# Altium PCB PCB_vpl1.PcbDoc
Units mm, origin at the board's own origin, x right, y up, seen from the top; angles counter-clockwise.
Board outline 50 x 60 mm, 2 copper layers (Top Layer, Bottom Layer); 6 components, 4 nets, 62 pads, 0 vias.
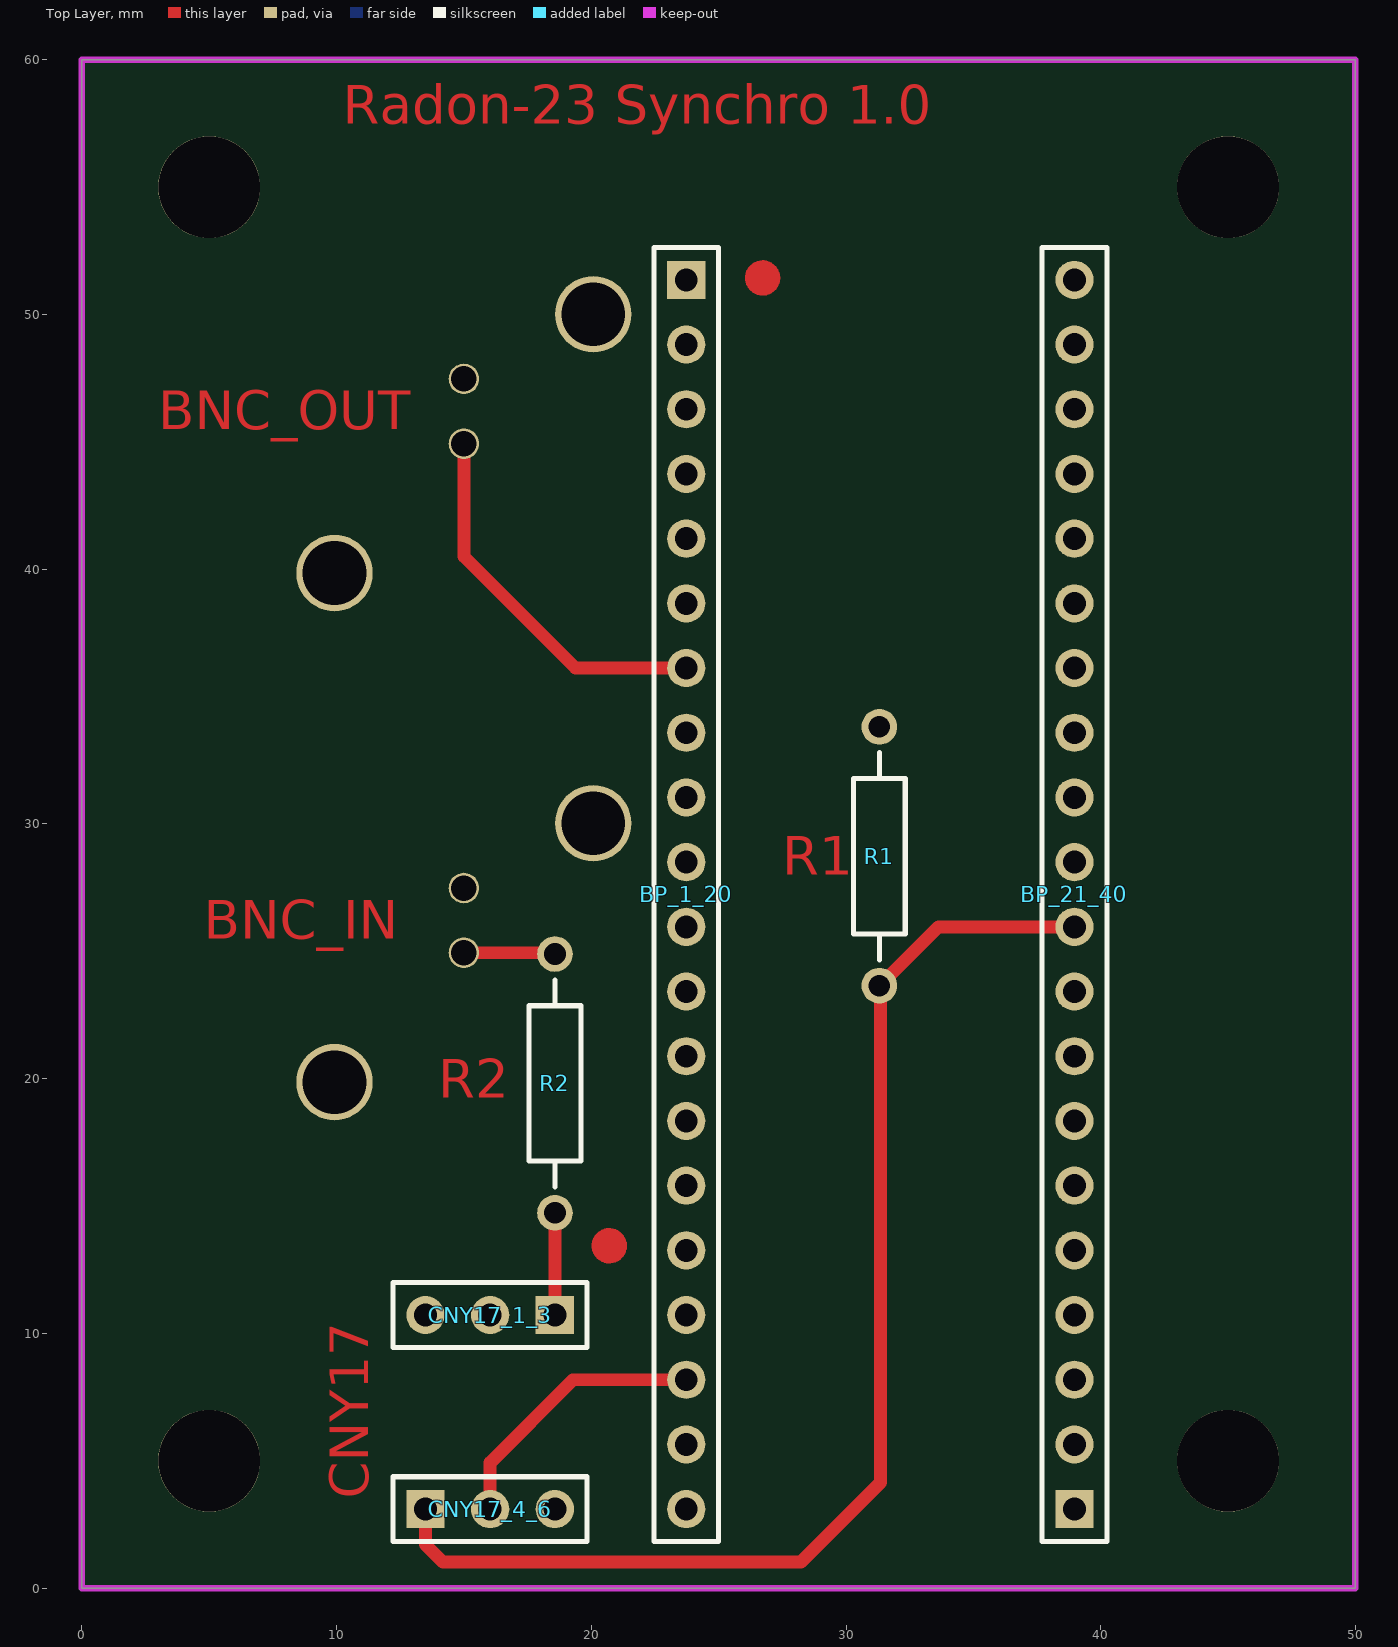
[diagram p0: Top Layer view]
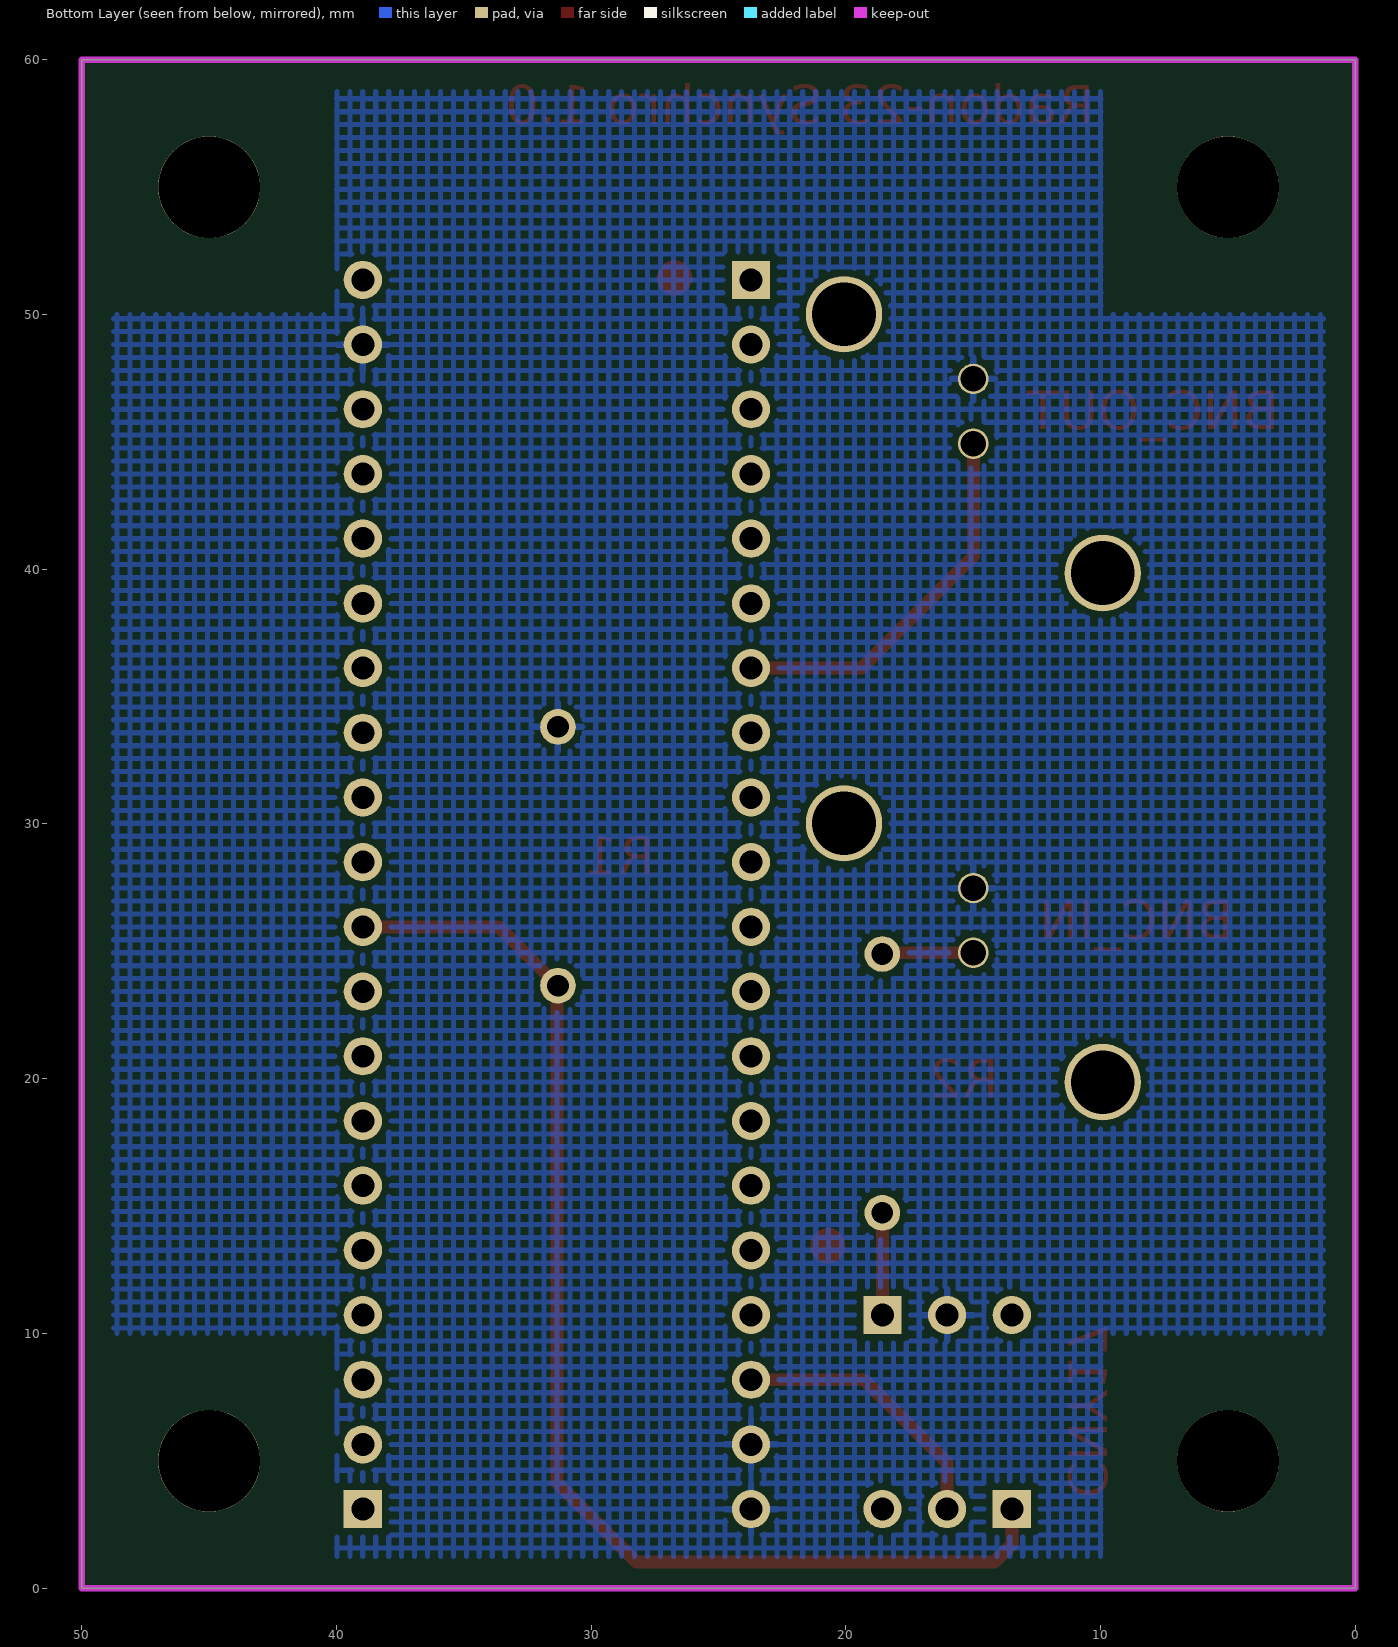
[diagram p1: Bottom Layer view, seen from below]

## Layer stack, top to bottom
Top Solder: solder mask 0.0102, Solder Resist, Dk 3.5
Top Layer: signal copper 0.0356
Dielectric 1: dielectric 0.32, FR-4, Dk 4.8
Bottom Layer: signal copper 0.0356
Bottom Solder: solder mask 0.0102, Solder Resist, Dk 3.5

## Board outline
0,0 50,0 50,60 0,60

## Design rules (kind name [scope] priority, off if disabled: settings)
Clearance [All] p1: gap=0.254
PolygonConnect [All] p1: connectstyle=Relief reliefconductorwidth=0.254 reliefentries=4 polygonreliefangle="90 Angle" airgapwidth=0.254
RoutingVias [All] p1: holewidth=0.711 width=1.27 viastyle="Through Hole" minholewidth=0.711 minwidth=1.27 maxholewidth=0.711 maxwidth=1.27
SolderMaskExpansion [All] p1: expansion=0.102
Width [All] p1: maxlimit=2.254 minlimit=0.254 preferedwidth=0.254
29 further rules are at their usual default settings.

## Components (designator, comment, footprint, x,y, rotation, side; value= is the part's Value field where it differs from the comment)
BP_1_20 "Header 20" HDR1X20 23.729,51.362 r270 top
BP_21_40 "Header 20" HDR1X20 38.969,3.102 r90 top
CNY17_1_3 "Header 3" HDR1X3 18.569,10.722 r180 top
CNY17_4_6 "Header 3" HDR1X3 13.489,3.102 r0 top
R1 "5k" AXIAL-0.4 31.309,28.734 r90 top
R2 "5k" AXIAL-0.4 18.573,19.815 r270 top

## Footprints (in the part's own frame and the unit in brackets; to place one, negate y for a bottom-side part, rotate by r counter-clockwise, add the part's x,y. Pads: shape width x height; smd on the part's side, far side on the other; paste and mask are expansions set on the pad)
AXIAL-0.4 [mm] "Axial Device, Thru-Hole; 2 Leads; 0.4 in Pin Spacing"
  round 1.4 hole 0.85: 1(-5.08,0) 2(5.08,0)
  silkscreen extent -4.06,-1.02 4.06,1.02
HDR1X3 [mm] "Connector; Header; 3 Position"
  rect 1.5x1.5 hole 0.9: 1(0,0)
  round 1.5 hole 0.9: 2(2.54,0) 3(5.08,0)
  silkscreen extent -1.27,-1.27 6.35,1.27
HDR1X20 [mm] "Connector; Header; 20 Position"
  rect 1.5x1.5 hole 0.9: 1(0,0)
  round 1.5 hole 0.9: 2(2.54,0) 3(5.08,0) 4(7.62,0) 5(10.16,0) 6(12.7,0) 7(15.24,0) 8(17.78,0) 9(20.32,0) 10(22.86,0) 11(25.4,0) 12(27.94,0) 13(30.48,0) 14(33.02,0) 15(35.56,0) 16(38.1,0) 17(40.64,0) 18(43.18,0) 19(45.72,0) 20(48.26,0)
  silkscreen extent -1.27,-1.27 49.53,1.27

## Part data
BP_1_20 BP_21_40: "Header, 20-Pin"
CNY17_1_3 CNY17_4_6: "Header, 3-Pin"
R1 R2: library part Res2, "Resistor"

## Free pads (board coordinates)
  round 4 hole 4 unplated: 0(5,5) 0(5,55) 0(45,5) 0(45,55)
  round 1.2 hole 1: 1(14.999,27.486) 1(14.999,47.472) 2(14.999,24.946) 2(14.999,44.932)
  round 3 hole 2.5: 3(9.919,19.866) 3(9.919,39.852) 4(20.079,30.026) 4(20.079,50.012)

## Nets (pads, with @x,y where several pads share a name; then routed paths per layer and width w, separated by ;. In a path a pad name is that pad's centre, name@x,y a point inside that pad or via, vN(x,y) a via of type N, cw(c..) or ccw(c..) an arc to the next point about the centre after c; other vN are vias at no path point)
GND: BP_1_20.19 BP_1_20.20 BP_21_40.19 CNY17_1_3.2 pad.1 R1.2
NetBP_21_40_10: BP_21_40.10 CNY17_4_6.1 R1.1 | length 48.9
  Top Layer w0.508: CNY17_4_6.1 13.489,1.709 14.179,1.019 28.228,1.019 31.349,4.14 31.349,23.676 33.635,25.962 BP_21_40.10
NetCNY17_1_3_1: CNY17_1_3.1 R2.2 | length 4
  Top Layer w0.508: CNY17_1_3.1 18.573,10.726 R2.2
VDD: BP_1_20.18 CNY17_4_6.2 | length 10.9
  Top Layer w0.508: CNY17_4_6.2 16.029,4.927 19.284,8.182 BP_1_20.18
pads on no net: BP_1_20.1 BP_1_20.2 BP_1_20.3 BP_1_20.4 BP_1_20.5 BP_1_20.6 BP_1_20.7 BP_1_20.8 BP_1_20.9 BP_1_20.10 BP_1_20.11 BP_1_20.12 BP_1_20.13 BP_1_20.14 BP_1_20.15 BP_1_20.16 BP_1_20.17 BP_21_40.1 BP_21_40.2 BP_21_40.3 BP_21_40.4 BP_21_40.5 BP_21_40.6 BP_21_40.7 BP_21_40.8 BP_21_40.9 BP_21_40.11 BP_21_40.12 BP_21_40.13 BP_21_40.14 BP_21_40.15 BP_21_40.16 BP_21_40.17 BP_21_40.18 BP_21_40.20 CNY17_1_3.3 CNY17_4_6.3 R2.1
copper on no net: | length 33.4
  Top Layer w0.254: 21.066,13.44 ccw(c20.707,13.44) 21.066,13.44 ; 21.275,13.44 ccw(c20.707,13.44) 21.275,13.44 ; 27.086,51.438 ccw(c26.726,51.438) 27.086,51.438 ; 27.294,51.438 ccw(c26.726,51.438) 27.294,51.438
  Top Layer w0.508: 14.999,24.946 18.573,24.946 ; 15,44.932 15,40.5 19.378,36.122 23.729,36.122
  Top Layer w0.762: 20.961,13.44 ccw(c20.707,13.44) 20.961,13.44 ; 26.98,51.438 ccw(c26.726,51.438) 26.98,51.438

## Polygon pours and split planes (outlines as drawn)
GND on Bottom Layer "Top Overlay-No Net" (hatched 90Degree grid 0.508 track 0.203, remove dead copper, pour order 4): 40,1.25 40,10 48.75,10 48.75,50 40,50 40,58.75 10,58.75 10,50 1.25,50 1.25,10 10,10 10,1.25

## Keep-outs
Keep-Out Layer:
  the board outline again, w0.254

## Other copper
Top Layer:
  text "Radon-23 Synchro 1.0" at 10.25,57.5 h1.52
  text "BNC_OUT" at 3,45.5 h1.52
  text "BNC_IN" at 4.777,25.5 h1.52
  text "CNY17" at 11.25,3.5 h1.52 r90

## Dimensions
0,60 to 0,0 on Top Overlay
0,60 to 50,60 on Top Overlay
5,55 to 14.999,47.472 on Top Overlay
23.729,3.102 to 38.969,3.102 on Top Overlay
5,55 to 45,55 on Top Overlay